# Altium PCB Light Panel - Copy.PcbDoc (part 2 of 2)
Units mm, origin at the board's own origin, x right, y up, seen from the top; angles counter-clockwise.
Board outline 300 x 185 mm, 2 copper layers (Top Layer, Bottom Layer), stack 1.671 mm thick; 278 components, 216 nets, 568 pads, 0 vias.
Unrouted connection lines stored in the file: 23.
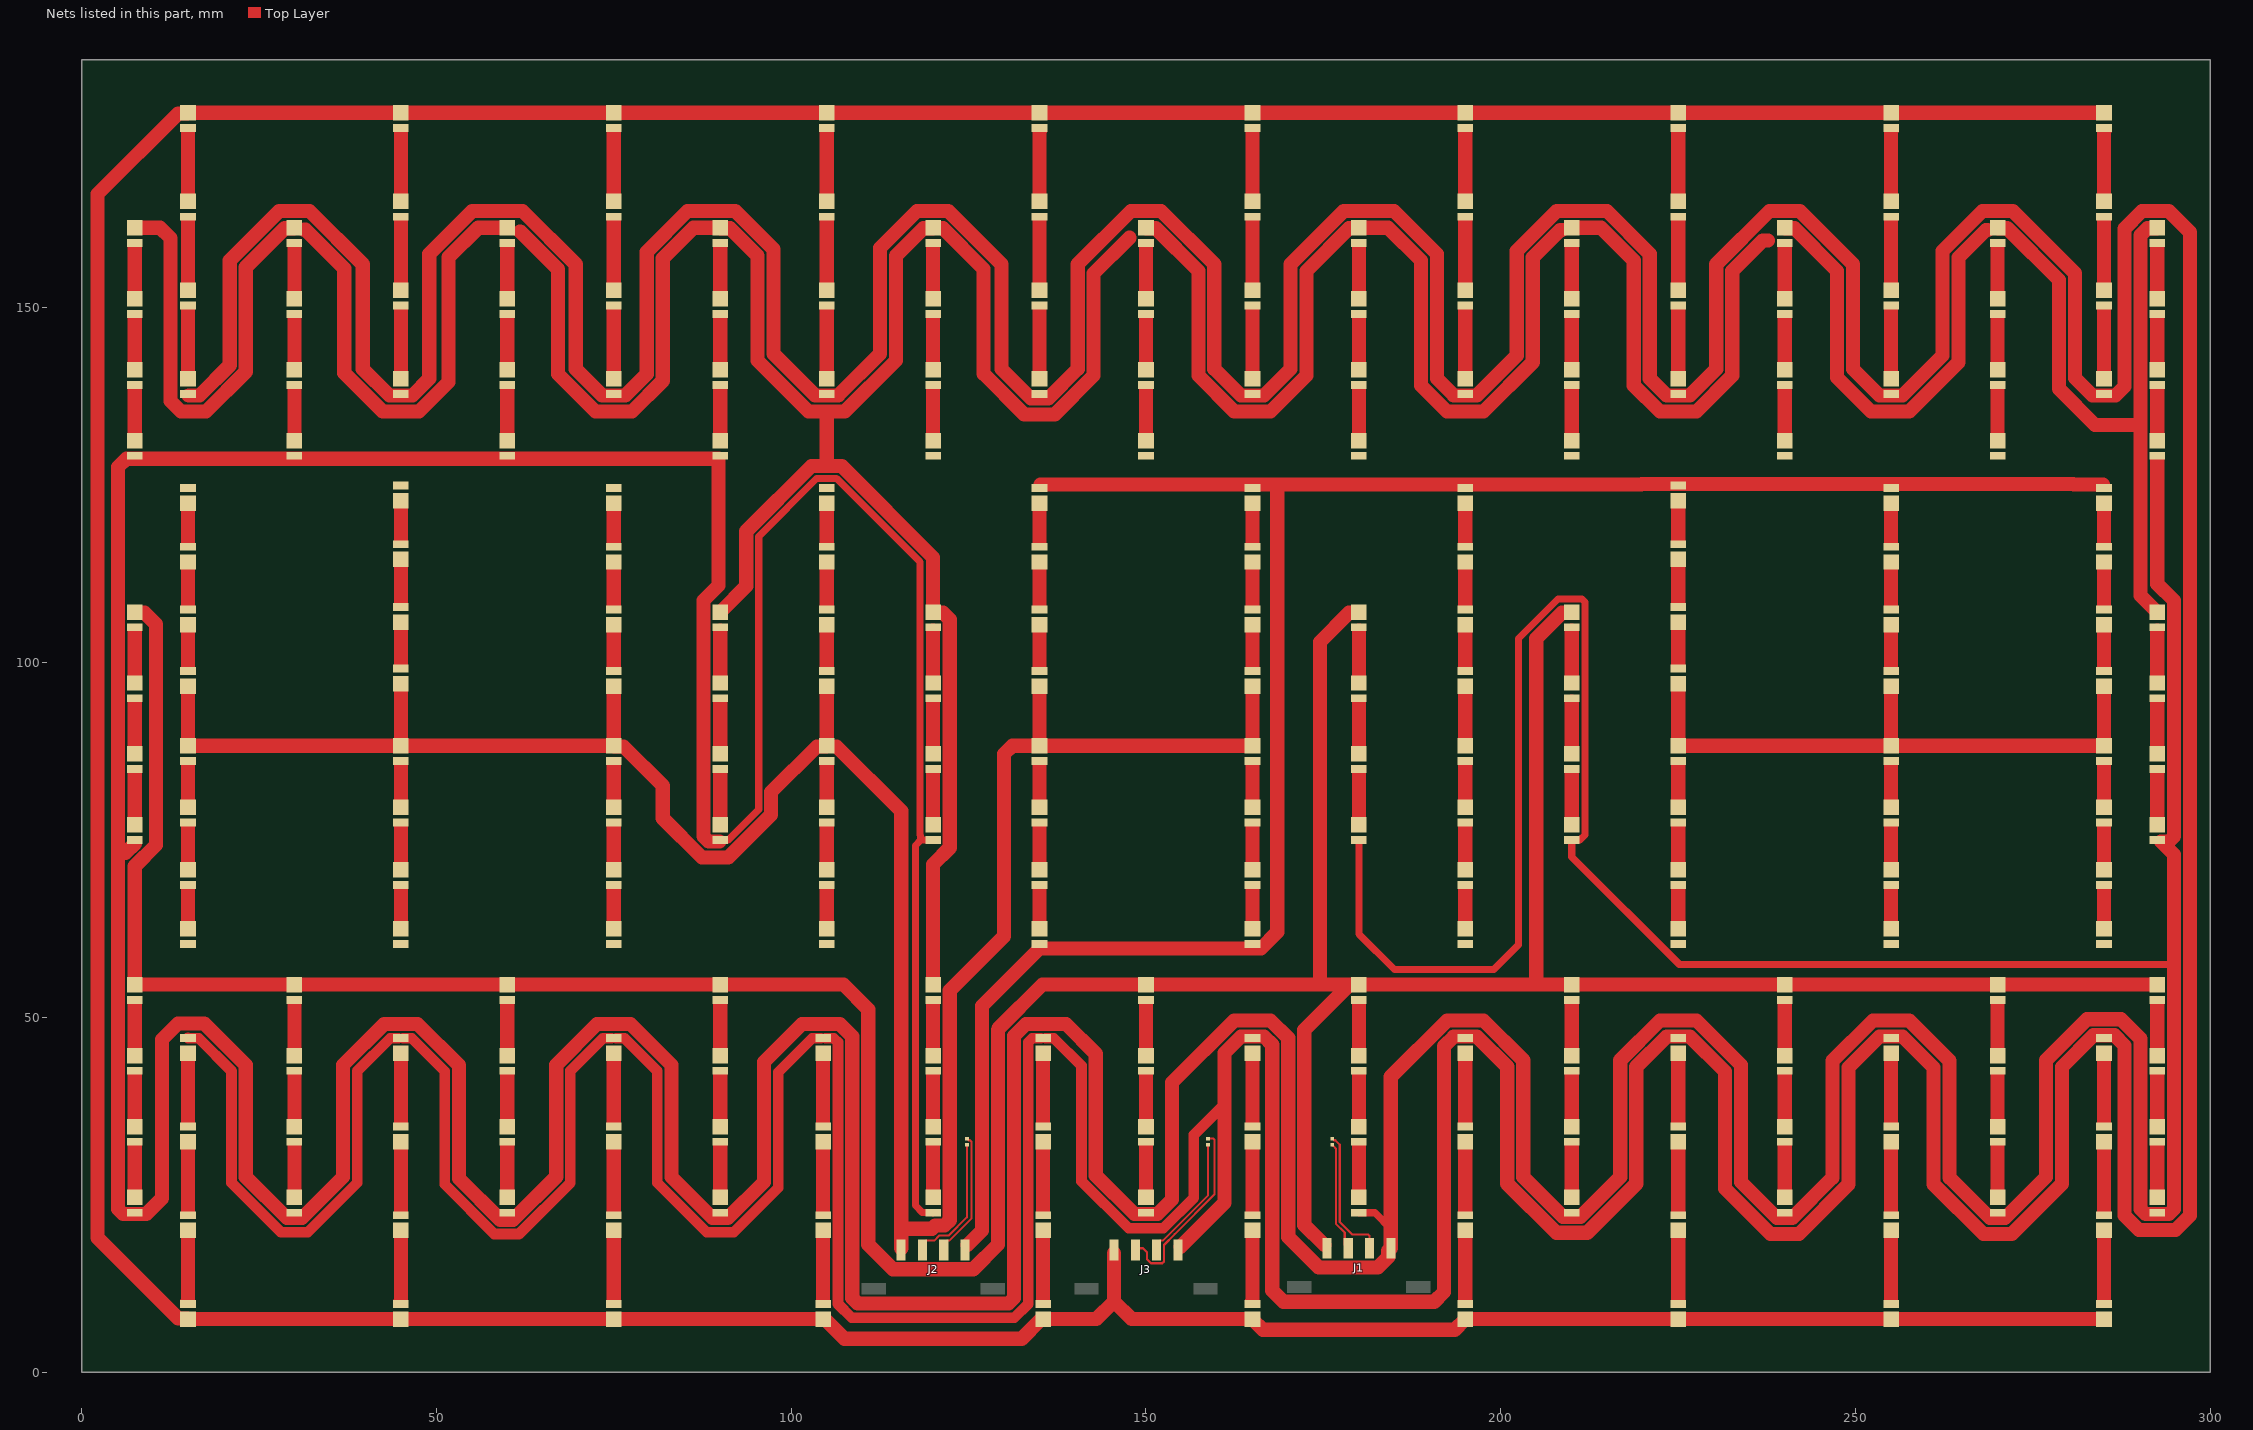
[diagram p2: the nets of this part, all layers, seen from the top]

## Part data
D1_WW1 D1_WW2 D1_WW3 D1_WW4 D1_WW5 D1_WW6 D1_WW7 D1_WW8 D1_WW9 D1_WW10 D1_WW11 D1_WW12 D1_WW13 D1_WW14 D1_WW15 D1_WW16 D1_WW17 D1_WW18 D1_WW19 D1_WW20 D2_WW1 D2_WW2 D2_WW3 D2_WW4 D2_WW5 D2_WW6 D2_WW7 D2_WW8 D2_WW9 D2_WW10 D2_WW11 D2_WW12 D2_WW13 D2_WW14 D2_WW15 D2_WW16 D2_WW17 D2_WW18 D2_WW19 D2_WW20 D3_WW1 D3_WW2 D3_WW3 D3_WW4 D3_WW5 D3_WW6 D3_WW7 D3_WW8 D3_WW9 D3_WW10 D3_WW11 D3_WW12 D3_WW13 D3_WW14 D3_WW15 D3_WW16 D3_WW17 D3_WW18 D3_WW19 D3_WW20 D4_WW1 D4_WW2 D4_WW3 D4_WW4 D4_WW5 D4_WW6 D4_WW7 D4_WW8 D4_WW9 D4_WW10 D4_WW11 D4_WW12 D4_WW13 D4_WW14 D4_WW15 D4_WW16 D4_WW17 D4_WW18 D4_WW19 D4_WW20: "LED", Color="White, Warm", CRI (Color Rendering Index)=90, Current - Max=200mA, Current - Test=65mA, Flux @ 25°C, Current - Test="30lm (29lm ~ 31lm)", Lumens/Watt @ Current - Test="165 lm/W", manufacturer="Samsung Semiconductor, Inc.", Supplier Device Package=2835, Supplier Part Number 1=1510-SPMWH1228MD7WAVUVKCT-ND, Voltage - Forward (Vf) (Typ)=2.8V, CCT (K)="3000K 3-Step MacAdam Ellipse", componentlink1description=Datasheet, componentlink1url=https://cdn.samsung.com/led/file/resource/2020/07/Data_Sheet_LM281B_Plus_Pro_VK_Rev.0.8.pdf, componentlink2description="DigiKey Link", componentlink2url=https://www.digikey.com/en/products/detail/samsung-semiconductor-inc/SPMWH1228MD7WAVUVK/12083623, Height - Seated (Max)="0.030\" (0.75mm)", lastupdated="21/03/2022 19:15:16", Lifecycle Status=Active, Minimum Order=1, Mounting Type="Surface Mount", packaging=TapeAndReel, Part Number=SPMWH1228MD7WAVUVK, Part Status=Active, partid=112, price=0.03, series=LM281B+, Size / Dimension="0.138\" L x 0.110\" W (3.50mm x 2.80mm)", Supplier 1=DigiKey, Viewing Angle=120°
D5_CW1 D5_CW2 D5_CW3 D5_CW4 D5_CW5 D5_CW6 D5_CW7 D5_CW8 D5_CW9 D5_CW10 D5_CW11 D5_CW12 D5_CW13 D5_CW14 D5_CW15 D5_CW16 D5_CW17 D5_CW18 D5_CW19 D5_CW20 D6_CW1 D6_CW2 D6_CW3 D6_CW4 D6_CW5 D6_CW6 D6_CW7 D6_CW8 D6_CW9 D6_CW10 D6_CW11 D6_CW12 D6_CW13 D6_CW14 D6_CW15 D6_CW16 D6_CW17 D6_CW18 D6_CW19 D6_CW20 D7_CW1 D7_CW2 D7_CW3 D7_CW4 D7_CW5 D7_CW6 D7_CW7 D7_CW8 D7_CW9 D7_CW10 D7_CW11 D7_CW12 D7_CW13 D7_CW14 D7_CW15 D7_CW16 D7_CW17 D7_CW18 D7_CW19 D7_CW20 D8_CW1 D8_CW2 D8_CW3 D8_CW4 D8_CW5 D8_CW6 D8_CW7 D8_CW8 D8_CW9 D8_CW10 D8_CW11 D8_CW12 D8_CW13 D8_CW14 D8_CW15 D8_CW16 D8_CW17 D8_CW18 D8_CW19 D8_CW20: "LED", Color="White, Cool", CRI (Color Rendering Index)=90, Current - Max=250mA, Current - Test=65mA, Device Package="1411 (3528 Metric)", Flux @ 25°C, Current - Test="33lm (32lm ~ 34lm)", Lumens/Watt @ Current - Test="181 lm/W", manufacturer="Samsung Semiconductor, Inc.", Supplier Device Package=1411, Supplier Part Number 1=1510-SPMWH1228MD7WAPMVLCT-ND, Voltage - Forward (Vf) (Typ)=2.8V, CCT (K)=6500K, componentlink1description=Datasheet, componentlink1url=https://media.digikey.com/pdf/Data%20Sheets/Samsung%20PDFs/LM281B_Plus%20Pro_VLrank_Rev_0.3_8-4-20.pdf, componentlink2description="DigiKey Link", componentlink2url=https://www.digikey.com/en/products/detail/samsung-semiconductor-inc/SPMWH1228MD7WAPMVL/13926354, Height - Seated (Max)="0.031\" (0.80mm)", lastupdated="21/03/2022 19:15:16", Lifecycle Status=Active, Minimum Order=1, Mounting Type="Surface Mount", Package / Case="1411 (3528 Metric)", packaging=TapeAndReel, Part Number=SPMWH1228MD7WAPMVL, Part Status=Active, partid=129, price=0.05, series=LM281B+, Size / Dimension="0.138\" L x 0.110\" W (3.50mm x 2.80mm)", Supplier 1=DigiKey, Viewing Angle=120°
D9_NW1 D9_NW2 D9_NW3 D9_NW4 D9_NW5 D9_NW6 D9_NW7 D9_NW8 D9_NW9 D9_NW10 D9_NW11 D9_NW12 D9_NW13 D9_NW14 D9_NW15 D9_NW16 D9_NW17 D9_NW18 D9_NW19 D9_NW20 D9_NW21 D9_NW22 D9_NW23 D9_NW24 D9_NW25 D9_NW26 D9_NW27 D9_NW28 D10_NW1 D10_NW2 D10_NW3 D10_NW4 D10_NW5 D10_NW6 D10_NW7 D10_NW8 D10_NW9 D10_NW10 D10_NW11 D10_NW12 D10_NW13 D10_NW14 D10_NW15 D10_NW16 D10_NW17 D10_NW18 D10_NW19 D10_NW20 D10_NW21 D10_NW22 D10_NW23 D10_NW24 D10_NW25 D10_NW26 D10_NW27 D10_NW28 D11_NW1 D11_NW2 D11_NW3 D11_NW4 D11_NW5 D11_NW6 D11_NW7 D11_NW8 D11_NW9 D11_NW10 D11_NW11 D11_NW12 D11_NW13 D11_NW14 D11_NW15 D11_NW16 D11_NW17 D11_NW18 D11_NW19 D11_NW20 D11_NW21 D11_NW22 D11_NW23 D11_NW24 D11_NW25 D11_NW26 D11_NW27 D11_NW28 D12_NW1 D12_NW2 D12_NW3 D12_NW4 D12_NW5 D12_NW6 D12_NW7 D12_NW8 D12_NW9 D12_NW10 D12_NW11 D12_NW12 D12_NW13 D12_NW14 D12_NW15 D12_NW16 D12_NW17 D12_NW18 D12_NW19 D12_NW20 D12_NW21 D12_NW22 D12_NW23 D12_NW24 D12_NW25 D12_NW26 D12_NW27 D12_NW28: "LED", Color="White, Neutral", CRI (Color Rendering Index)=90, Current - Max=250mA, Current - Test=65mA, Device Package="1411 (3528 Metric)", Flux @ 25°C, Current - Test="33lm (32lm ~ 34lm)", Lumens/Watt @ Current - Test="181 lm/W", manufacturer="Samsung Semiconductor, Inc.", Supplier Device Package=1411, Supplier Part Number 1=1510-SPMWH1228MD7WATMVLCT-ND, Voltage - Forward (Vf) (Typ)=2.8V, CCT (K)=4000K, componentlink1description=Datasheet, componentlink1url=https://media.digikey.com/pdf/Data%20Sheets/Samsung%20PDFs/LM281B_Plus%20Pro_VLrank_Rev_0.3_8-4-20.pdf, componentlink2description="DigiKey Link", componentlink2url=https://www.digikey.com/en/products/detail/samsung-semiconductor-inc/SPMWH1228MD7WATMVL/13926315, Height - Seated (Max)="0.031\" (0.80mm)", lastupdated="21/03/2022 19:15:15", Lifecycle Status=Active, Minimum Order=1, Mounting Type="Surface Mount", Package / Case="1411 (3528 Metric)", packaging=TapeAndReel, Part Number=SPMWH1228MD7WATMVL, Part Status=Active, partid=111, price=0.05, series=LM281B+, Size / Dimension="0.138\" L x 0.110\" W (3.50mm x 2.80mm)", Supplier 1=DigiKey, Viewing Angle=120°
J1 J2 J3: "CONN HEADER SMD R/A 4POS 3MM", Insulation Color=Black, manufacturer=Molex, Material Flammability Rating="UL94 V-0", Supplier Part Number 1=WM1892CT-ND, componentlink1description=Datasheet, componentlink1url=https://www.molex.com/pdm_docs/sd/436500412_sd.pdf, componentlink2description="DigiKey Link", componentlink2url=https://www.digikey.com/en/products/detail/molex/0436500412/3451041, Connector Type=Header, Contact Finish - Mating=Tin, Contact Finish - Post=Tin, Contact Finish Thickness - Mating="60.0µin (1.52µm)", Contact Material=Brass, Contact Shape=Square, Contact Type="Male Pin", Fastening Type="Locking Ramp", Features="Solder Retention", Insulation Height="0.172\" (4.37mm)", Insulation Material="Liquid Crystal Polymer (LCP), Glass Filled", lastupdated="21/03/2022 20:35:03", Lifecycle Status=Active, Minimum Order=1, Mounting Type="Surface Mount, Right Angle", Number of Positions=4, Number of Positions Loaded=All, Number of Rows=1, packaging=TapeAndReel, Part Number=0436500412, Part Status=Active, partid=134, Pitch - Mating="0.118\" (3.00mm)", price=1.64, series="Micro-Fit 3.0 43650", Shrouding="Shrouded - 4 Wall", Style="Board to Cable/Wire", Supplier 1=DigiKey, Termination=Solder
R1 R2 R3: library part NTCG104BF473FT1X, "THERMISTOR NTC 47KOHM 4485K 0402", B Value Tolerance=±1%, Device Package="0402 (1005 Metric)", manufacturer="TDK Corporation", Operating Temperature="-40°C ~ 125°C", Power - Max="100 mW", Supplier Part Number 1=445-174900-1-ND, B25/50=4485K, B25/85=4550K, componentlink1description=Datasheet, componentlink1url=https://product.tdk.com/info/en/catalog/datasheets/503021/tpd_commercial_ntc-thermistor_ntcg_en.pdf?ref_disty=digikey, componentlink2description="DigiKey Link", componentlink2url=https://www.digikey.com/en/products/detail/tdk-corporation/NTCG104BF473FT1X/5285693, lastupdated="21/03/2022 19:01:14", Lifecycle Status=Active, Minimum Order=1, Mounting Type="Surface Mount", Package / Case="0402 (1005 Metric)", packaging=TapeAndReel, Part Number=NTCG104BF473FT1X, Part Status=Active, partid=53, price=0.03, Resistance in Ohms @ 25°C=47k, Resistance Tolerance=±1%, series=NTCG, Supplier 1=DigiKey

## Nets (pads, with @x,y where several pads share a name; then routed paths per layer and width w, separated by ;. In a path a pad name is that pad's centre, name@x,y a point inside that pad or via, vN(x,y) a via of type N, cw(c..) or ccw(c..) an arc to the next point about the centre after c; other vN are vias at no path point)
NetD1_WW1_A: D1_WW1.A D1_WW2.A D1_WW3.A D1_WW4.A D1_WW5.A D1_WW6.A D1_WW7.A D1_WW8.A D1_WW9.A D1_WW10.A D1_WW11.A D1_WW12.A D1_WW13.A D1_WW14.A D1_WW15.A D1_WW16.A D1_WW17.A D1_WW18.A D1_WW19.A D1_WW20.A J2.1 | length 293.3
  Top Layer w2: J2.1@124.865,17.96 126.884,19.979 126.884,28.297 126.884,51.634 135,59.75 165,59.75 166.213,59.75 168.5,62.037 168.5,125.097 ; D1_WW16.A@135.153,125.097 219.773,125.097 219.875,125.199 280.648,125.199 280.75,125.097 D1_WW2.A@284.847,125.097
NetD1_WW1_C: D1_WW1.C D2_WW1.A | length 5.5
  Top Layer w2: D1_WW1.C@285,62.5 285,68
NetD1_WW2_C: D1_WW2.C D2_WW2.A | length 5.5
  Top Layer w2: 285,117 D1_WW2.C@285,122.5
NetD1_WW3_C: D1_WW3.C D2_WW3.A | length 5.5
  Top Layer w2: 255,117 D1_WW3.C@255,122.5
NetD1_WW4_C: D1_WW4.C D2_WW4.A | length 5.5
  Top Layer w2: D1_WW4.C@255,62.5 255,68
NetD1_WW5_C: D1_WW5.C D2_WW5.A | length 5.5
  Top Layer w2: D1_WW5.C@225,62.5 225,68
NetD1_WW6_C: D1_WW6.C D2_WW6.A | length 5.5
  Top Layer w2: D1_WW6.C@195,62.5 195,68
NetD1_WW7_C: D1_WW7.C D2_WW7.A | length 5.5
  Top Layer w2: D1_WW7.C@165,62.5 165,68
NetD1_WW8_C: D1_WW8.C D2_WW8.A | length 5.5
  Top Layer w2: D1_WW8.C@135,62.5 135,68
NetD1_WW9_C: D1_WW9.C D2_WW9.A | length 5.5
  Top Layer w2: D1_WW9.C@105,62.5 105,68
NetD1_WW10_C: D1_WW10.C D2_WW10.A | length 5.5
  Top Layer w2: D1_WW10.C@75,62.5 75,68
NetD1_WW11_C: D1_WW11.C D2_WW11.A | length 5.5
  Top Layer w2: D1_WW11.C@45,62.5 45,68
NetD1_WW12_C: D1_WW12.C D2_WW12.A | length 5.5
  Top Layer w2: D1_WW12.C@15,62.5 15,68
NetD1_WW13_C: D1_WW13.C D2_WW13.A | length 5.5
  Top Layer w2: 225,117.355 D1_WW13.C@225,122.855
NetD1_WW14_C: D1_WW14.C D2_WW14.A | length 5.5
  Top Layer w2: 195,117 D1_WW14.C@195,122.5
NetD1_WW15_C: D1_WW15.C D2_WW15.A | length 5.5
  Top Layer w2: 165,117 D1_WW15.C@165,122.5
NetD1_WW16_C: D1_WW16.C D2_WW16.A | length 5.5
  Top Layer w2: 135,117 D1_WW16.C@135,122.5
NetD1_WW17_C: D1_WW17.C D2_WW17.A | length 5.5
  Top Layer w2: 105,117 D1_WW17.C@105,122.5
NetD1_WW18_C: D1_WW18.C D2_WW18.A | length 5.5
  Top Layer w2: 75,117 D1_WW18.C@75,122.5
NetD1_WW19_C: D1_WW19.C D2_WW19.A | length 5.5
  Top Layer w2: 45,117.355 D1_WW19.C@45,122.855
NetD1_WW20_C: D1_WW20.C D2_WW20.A | length 5.5
  Top Layer w2: 15,117 D1_WW20.C@15,122.5
NetD2_WW1_C: D2_WW1.C D3_WW1.A | length 5.9
  Top Layer w2: D2_WW1.C@285,70.805 285,76.75
NetD2_WW2_C: D2_WW2.C D3_WW2.A | length 5.9
  Top Layer w2: 285,108.25 D2_WW2.C@285,114.195
NetD2_WW3_C: D2_WW3.C D3_WW3.A | length 5.9
  Top Layer w2: 255,108.25 D2_WW3.C@255,114.195
NetD2_WW4_C: D2_WW4.C D3_WW4.A | length 5.9
  Top Layer w2: D2_WW4.C@255,70.805 255,76.75
NetD2_WW5_C: D2_WW5.C D3_WW5.A | length 5.9
  Top Layer w2: D2_WW5.C@225,70.805 225,76.75
NetD2_WW6_C: D2_WW6.C D3_WW6.A | length 5.9
  Top Layer w2: D2_WW6.C@195,70.805 195,76.75
NetD2_WW7_C: D2_WW7.C D3_WW7.A | length 5.9
  Top Layer w2: D2_WW7.C@165,70.805 165,76.75
NetD2_WW8_C: D2_WW8.C D3_WW8.A | length 5.9
  Top Layer w2: D2_WW8.C@135,70.805 135,76.75
NetD2_WW9_C: D2_WW9.C D3_WW9.A | length 5.9
  Top Layer w2: D2_WW9.C@105,70.805 105,76.75
NetD2_WW10_C: D2_WW10.C D3_WW10.A | length 5.9
  Top Layer w2: D2_WW10.C@75,70.805 75,76.75
NetD2_WW11_C: D2_WW11.C D3_WW11.A | length 5.9
  Top Layer w2: D2_WW11.C@45,70.805 45,76.75
NetD2_WW12_C: D2_WW12.C D3_WW12.A | length 5.9
  Top Layer w2: D2_WW12.C@15,70.805 15,76.75
NetD2_WW13_C: D2_WW13.C D3_WW13.A | length 5.9
  Top Layer w2: 225,108.605 D2_WW13.C@225,114.55
NetD2_WW14_C: D2_WW14.C D3_WW14.A | length 5.9
  Top Layer w2: 195,108.25 D2_WW14.C@195,114.195
NetD2_WW15_C: D2_WW15.C D3_WW15.A | length 5.9
  Top Layer w2: 165,108.25 D2_WW15.C@165,114.195
NetD2_WW16_C: D2_WW16.C D3_WW16.A | length 5.9
  Top Layer w2: 135,108.25 D2_WW16.C@135,114.195
NetD2_WW17_C: D2_WW17.C D3_WW17.A | length 5.9
  Top Layer w2: 105,108.25 D2_WW17.C@105,114.195
NetD2_WW18_C: D2_WW18.C D3_WW18.A | length 5.9
  Top Layer w2: 75,108.25 D2_WW18.C@75,114.195
NetD2_WW19_C: D2_WW19.C D3_WW19.A | length 5.9
  Top Layer w2: 45,108.605 D2_WW19.C@45,114.55
NetD2_WW20_C: D2_WW20.C D3_WW20.A | length 5.9
  Top Layer w2: 15,108.25 D2_WW20.C@15,114.195
NetD3_WW1_C: D3_WW1.C D4_WW1.A | length 5.9
  Top Layer w2: D3_WW1.C@285,79.645 285,85.5
NetD3_WW2_C: D3_WW2.C D4_WW2.A | length 5.9
  Top Layer w2: 285,99.5 D3_WW2.C@285,105.355
NetD3_WW3_C: D3_WW3.C D4_WW3.A | length 5.9
  Top Layer w2: 255,99.5 D3_WW3.C@255,105.355
NetD3_WW4_C: D3_WW4.C D4_WW4.A | length 5.9
  Top Layer w2: D3_WW4.C@255,79.645 255,85.5
NetD3_WW5_C: D3_WW5.C D4_WW5.A | length 5.9
  Top Layer w2: D3_WW5.C@225,79.645 225,85.5
NetD3_WW6_C: D3_WW6.C D4_WW6.A | length 5.9
  Top Layer w2: D3_WW6.C@195,79.645 195,85.5
NetD3_WW7_C: D3_WW7.C D4_WW7.A | length 5.9
  Top Layer w2: D3_WW7.C@165,79.645 165,85.5
NetD3_WW8_C: D3_WW8.C D4_WW8.A | length 5.9
  Top Layer w2: D3_WW8.C@135,79.645 135,85.5
NetD3_WW9_C: D3_WW9.C D4_WW9.A | length 5.9
  Top Layer w2: D3_WW9.C@105,79.645 105,85.5
NetD3_WW10_C: D3_WW10.C D4_WW10.A | length 5.9
  Top Layer w2: D3_WW10.C@75,79.645 75,85.5
NetD3_WW11_C: D3_WW11.C D4_WW11.A | length 5.9
  Top Layer w2: D3_WW11.C@45,79.645 45,85.5
NetD3_WW12_C: D3_WW12.C D4_WW12.A | length 5.9
  Top Layer w2: D3_WW12.C@15,79.645 15,85.5
NetD3_WW13_C: D3_WW13.C D4_WW13.A | length 5.9
  Top Layer w2: 225,99.855 D3_WW13.C@225,105.71
NetD3_WW14_C: D3_WW14.C D4_WW14.A | length 5.9
  Top Layer w2: 195,99.5 D3_WW14.C@195,105.355
NetD3_WW15_C: D3_WW15.C D4_WW15.A | length 5.9
  Top Layer w2: 165,99.5 D3_WW15.C@165,105.355
NetD3_WW16_C: D3_WW16.C D4_WW16.A | length 5.9
  Top Layer w2: 135,99.5 D3_WW16.C@135,105.355
NetD3_WW17_C: D3_WW17.C D4_WW17.A | length 5.9
  Top Layer w2: 105,99.5 D3_WW17.C@105,105.355
NetD3_WW18_C: D3_WW18.C D4_WW18.A | length 5.9
  Top Layer w2: 75,99.5 D3_WW18.C@75,105.355
NetD3_WW19_C: D3_WW19.C D4_WW19.A | length 5.9
  Top Layer w2: 45,99.855 D3_WW19.C@45,105.71
NetD3_WW20_C: D3_WW20.C D4_WW20.A | length 5.9
  Top Layer w2: 15,99.5 D3_WW20.C@15,105.355
NetD4_WW1_C: D4_WW1.C D4_WW2.C D4_WW3.C D4_WW4.C D4_WW5.C D4_WW6.C D4_WW7.C D4_WW8.C D4_WW9.C D4_WW10.C D4_WW11.C D4_WW12.C D4_WW13.C D4_WW14.C D4_WW15.C D4_WW16.C D4_WW17.C D4_WW18.C D4_WW19.C D4_WW20.C J2.4 | length 438.4
  Top Layer w2: D4_WW20.C@15,96.695 D4_WW12.C@15,88.305 D4_WW11.C@45,88.305 ; D4_WW19.C@45,97.05 D4_WW11.C@45,88.305 ; D4_WW18.C@75,96.695 D4_WW10.C@75,88.305 ; D4_WW17.C@105,96.695 D4_WW9.C@105,88.305 104.91,88.215 103.627,88.215 97.178,81.766 97.178,78.586 91.139,72.547 87.447,72.547 81.91,78.084 81.91,82.678 76.373,88.215 75.09,88.215 D4_WW10.C@75,88.305 ; 106.373,88.215 115.5,79.088 115.5,20.25 ; J2.4@115.5,17.5 115.5,20.25 ; D4_WW16.C@135,96.695 D4_WW8.C@135,88.305 ; D4_WW15.C@165,96.695 D4_WW7.C@165,88.305 D4_WW8.C@135,88.305 ; D4_WW6.C@195,88.305 D4_WW14.C@195,96.695 ; D4_WW13.C@225,97.05 D4_WW5.C@225,88.305 D4_WW4.C@255,88.305 ; D4_WW3.C@255,96.695 D4_WW4.C@255,88.305 ; D4_WW2.C@285,96.695 D4_WW1.C@285,88.305 D4_WW4.C@255,88.305 ; D4_WW11.C@45,88.305 D4_WW10.C@75,88.305 ; 115.5,20.25 119.848,20.25 120.289,20.691 121.62,20.691 122.354,21.426 122.354,53.811 130,61.457 130,87.133 131.172,88.305 D4_WW8.C@135,88.305
NetD5_CW1_A: D5_CW1.A D5_CW2.A D5_CW3.A D5_CW4.A D5_CW5.A D5_CW6.A D5_CW7.A D5_CW8.A D5_CW9.A D5_CW10.A D5_CW11.A D5_CW12.A D5_CW13.A D5_CW14.A D5_CW15.A D5_CW16.A D5_CW17.A D5_CW18.A D5_CW19.A D5_CW20.A J3.1 | length 1566.9
  Top Layer w1.5: D5_CW10.A@15,47.145 15.051,47.094 16.516,47.094 21.135,42.475 21.135,26.713 28.102,19.746 31.899,19.746 38.865,26.713 38.865,42.475 43.484,47.094 D5_CW9.A@44.65,47.094 ; D5_CW9.A@45.35,47.094 46.516,47.094 51.169,42.441 51.169,26.497 58.17,19.496 61.649,19.496 68.891,26.738 68.891,42.501 73.484,47.094 D5_CW8.A@74.65,47.094 ; D5_CW8.A@75.35,47.094 76.516,47.094 81.135,42.475 81.135,26.713 88.102,19.746 91.899,19.746 98.162,26.009 98.162,42.272 102.984,47.094 D5_CW7.A@104.15,47.094 ; D5_CW7.A@104.85,47.094 106.016,47.094 106.604,46.506 106.604,9.643 108.55,7.697 131.45,7.697 133.396,9.643 133.396,46.506 133.984,47.094 D5_CW6.A@135.15,47.094 ; D5_CW6.A@135.85,47.094 137.016,47.094 140.92,43.19 140.92,26.928 147.551,20.297 152.45,20.297 156.752,24.6 156.752,33.502 161.055,37.805
  Top Layer w2: D5_CW20.A@15.1,137.656 16.619,137.656 20.895,141.932 20.895,156.671 27.873,163.649 32.127,163.649 39.631,156.145 39.631,141.406 43.381,137.656 D5_CW19.A@44.9,137.656 ; D5_CW19.A@45.1,137.656 46.619,137.656 49.006,140.042 49.006,157.598 55.057,163.649 62.127,163.649 69.631,156.145 69.631,141.406 73.381,137.656 D5_CW18.A@74.9,137.656 ; D5_CW18.A@75.1,137.656 76.619,137.656 79.644,140.68 79.644,157.894 85.399,163.649 92.127,163.649 97.5,158.276 97.5,143.537 103.381,137.656 D5_CW17.A@104.9,137.656 ; D5_CW17.A@105.1,137.656 106.619,137.656 112.5,143.537 112.5,158.438 117.711,163.649 122.127,163.649 129.631,156.145 129.631,141.406 133.787,137.25 135,137.25 136.213,137.25 140.369,141.406 140.369,156.145 147.873,163.649 152.127,163.649 159.631,156.145 159.631,141.406 163.381,137.656 D5_CW15.A@164.9,137.656 ; J3.1@154.865,17.71 161.055,23.9 161.055,37.805 161.055,45.018 163.381,47.344 D5_CW5.A@164.9,47.344 ; D5_CW5.A@165.1,47.344 166.619,47.344 167.799,46.165 167.799,11.533 169.381,9.951 190.619,9.951 192,11.332 192,45.963 193.381,47.344 D5_CW4.A@194.9,47.344 ; D5_CW15.A@165.1,137.656 166.619,137.656 170.369,141.406 170.369,156.145 177.873,163.649 184.944,163.649 190.994,157.598 190.994,140.042 193.381,137.656 D5_CW14.A@194.9,137.656 ; D5_CW4.A@195.1,47.344 196.619,47.344 200.904,43.06 200.904,26.59 207.829,19.665 212.171,19.665 219.096,26.59 219.096,43.06 223.381,47.344 D5_CW3.A@224.9,47.344 ; D5_CW14.A@195.1,137.656 196.619,137.656 202.246,143.283 202.246,158.022 207.873,163.649 214.944,163.649 220.994,157.598 220.994,140.042 223.381,137.656 D5_CW13.A@224.9,137.656 ; D5_CW3.A@225.1,47.344 226.619,47.344 231.58,42.383 231.58,25.914 237.998,19.496 242.002,19.496 249.012,26.506 249.012,42.975 253.381,47.344 D5_CW2.A@254.9,47.344 ; D5_CW13.A@225.1,137.656 226.619,137.656 230.369,141.406 230.369,156.145 237.873,163.649 242.127,163.649 249.631,156.145 249.631,141.406 253.381,137.656 D5_CW12.A@254.9,137.656 ; D5_CW2.A@255.1,47.344 256.619,47.344 260.988,42.975 260.988,26.506 267.998,19.496 272.002,19.496 279.09,26.584 279.09,43.053 283.537,47.5 D5_CW1.A@284.9,47.5 ; D5_CW12.A@255.1,137.656 256.619,137.656 262.246,143.283 262.246,158.022 267.873,163.649 272.127,163.649 280.904,154.872 280.904,140.133 283.381,137.656 D5_CW11.A@284.9,137.656 ; D5_CW1.A@285.1,47.5 286.463,47.5 287.892,46.071 287.892,22.102 289.947,20.047 295.053,20.047 297.108,22.102 297.108,160.66 294.12,163.649 290.373,163.649 287.892,161.168 287.892,138.929 286.619,137.656 D5_CW11.A@285.1,137.656
NetD5_CW1_C: D5_CW1.C D6_CW1.A | length 9.7
  Top Layer w2: 285,35.25 D5_CW1.C@285,45
NetD5_CW2_C: D5_CW2.C D6_CW2.A | length 9.7
  Top Layer w2: 255,35.25 D5_CW2.C@255,45
NetD5_CW3_C: D5_CW3.C D6_CW3.A | length 9.7
  Top Layer w2: 225,35.25 D5_CW3.C@225,45
NetD5_CW4_C: D5_CW4.C D6_CW4.A | length 9.7
  Top Layer w2: 195,35.25 D5_CW4.C@195,45
NetD5_CW5_C: D5_CW5.C D6_CW5.A | length 9.7
  Top Layer w2: 165,35.25 D5_CW5.C@165,45
NetD5_CW6_C: D5_CW6.C D6_CW6.A | length 9.7
  Top Layer w2: 135.5,35.25 D5_CW6.C@135.5,45
NetD5_CW7_C: D5_CW7.C D6_CW7.A | length 9.7
  Top Layer w2: 104.5,35.25 D5_CW7.C@104.5,45
NetD5_CW8_C: D5_CW8.C D6_CW8.A | length 9.7
  Top Layer w2: 75,35.25 D5_CW8.C@75,45
NetD5_CW9_C: D5_CW9.C D6_CW9.A | length 9.7
  Top Layer w2: 45,35.25 D5_CW9.C@45,45
NetD5_CW10_C: D5_CW10.C D6_CW10.A | length 9.7
  Top Layer w2: 15,35.25 D5_CW10.C@15,45
NetD5_CW11_C: D5_CW11.C D6_CW11.A | length 9.7
  Top Layer w2: D5_CW11.C@285,140 285,149.75
NetD5_CW12_C: D5_CW12.C D6_CW12.A | length 9.7
  Top Layer w2: D5_CW12.C@255,140 255,149.75
NetD5_CW13_C: D5_CW13.C D6_CW13.A | length 9.7
  Top Layer w2: D5_CW13.C@225,140 225,149.75
NetD5_CW14_C: D5_CW14.C D6_CW14.A | length 9.7
  Top Layer w2: D5_CW14.C@195,140 195,149.75
NetD5_CW15_C: D5_CW15.C D6_CW15.A | length 9.7
  Top Layer w2: D5_CW15.C@165,140 165,149.75
NetD5_CW16_C: D5_CW16.C D6_CW16.A | length 9.7
  Top Layer w2: D5_CW16.C@135,140 135,149.75
NetD5_CW17_C: D5_CW17.C D6_CW17.A | length 9.7
  Top Layer w2: D5_CW17.C@105,140 105,149.75
NetD5_CW18_C: D5_CW18.C D6_CW18.A | length 9.7
  Top Layer w2: D5_CW18.C@75,140 75,149.75
NetD5_CW19_C: D5_CW19.C D6_CW19.A | length 9.7
  Top Layer w2: D5_CW19.C@45,140 45,149.75
NetD5_CW20_C: D5_CW20.C D6_CW20.A | length 9.7
  Top Layer w2: D5_CW20.C@15,140 15,149.75
NetD6_CW1_C: D6_CW1.C D7_CW1.A | length 9.9
  Top Layer w2: D7_CW1.A@285,22.59 D6_CW1.C@285,32.5
NetD6_CW2_C: D6_CW2.C D7_CW2.A | length 9.9
  Top Layer w2: D7_CW2.A@255,22.59 D6_CW2.C@255,32.5
NetD6_CW3_C: D6_CW3.C D7_CW3.A | length 9.9
  Top Layer w2: D7_CW3.A@225,22.59 D6_CW3.C@225,32.5
NetD6_CW4_C: D6_CW4.C D7_CW4.A | length 9.9
  Top Layer w2: D7_CW4.A@195,22.59 D6_CW4.C@195,32.5
NetD6_CW5_C: D6_CW5.C D7_CW5.A | length 9.9
  Top Layer w2: D7_CW5.A@165,22.59 D6_CW5.C@165,32.5
NetD6_CW6_C: D6_CW6.C D7_CW6.A | length 9.9
  Top Layer w2: D7_CW6.A@135.5,22.59 D6_CW6.C@135.5,32.5
NetD6_CW7_C: D6_CW7.C D7_CW7.A | length 9.9
  Top Layer w2: D7_CW7.A@104.5,22.59 D6_CW7.C@104.5,32.5
NetD6_CW8_C: D6_CW8.C D7_CW8.A | length 9.9
  Top Layer w2: D7_CW8.A@75,22.59 D6_CW8.C@75,32.5
NetD6_CW9_C: D6_CW9.C D7_CW9.A | length 9.9
  Top Layer w2: D7_CW9.A@45,22.59 D6_CW9.C@45,32.5
NetD6_CW10_C: D6_CW10.C D7_CW10.A | length 9.9
  Top Layer w2: D7_CW10.A@15,22.59 D6_CW10.C@15,32.5
NetD6_CW11_C: D6_CW11.C D7_CW11.A | length 9.9
  Top Layer w2: D6_CW11.C@285,152.5 D7_CW11.A@285,162.41
NetD6_CW12_C: D6_CW12.C D7_CW12.A | length 9.9
  Top Layer w2: D6_CW12.C@255,152.5 D7_CW12.A@255,162.41
NetD6_CW13_C: D6_CW13.C D7_CW13.A | length 9.9
  Top Layer w2: D6_CW13.C@225,152.5 D7_CW13.A@225,162.41
NetD6_CW14_C: D6_CW14.C D7_CW14.A | length 9.9
  Top Layer w2: D6_CW14.C@195,152.5 D7_CW14.A@195,162.41
NetD6_CW15_C: D6_CW15.C D7_CW15.A | length 9.9
  Top Layer w2: D6_CW15.C@165,152.5 D7_CW15.A@165,162.41
NetD6_CW16_C: D6_CW16.C D7_CW16.A | length 9.9
  Top Layer w2: D6_CW16.C@135,152.5 D7_CW16.A@135,162.41
NetD6_CW17_C: D6_CW17.C D7_CW17.A | length 9.9
  Top Layer w2: D6_CW17.C@105,152.5 D7_CW17.A@105,162.41
NetD6_CW18_C: D6_CW18.C D7_CW18.A | length 9.9
  Top Layer w2: D6_CW18.C@75,152.5 D7_CW18.A@75,162.41
NetD6_CW19_C: D6_CW19.C D7_CW19.A | length 9.9
  Top Layer w2: D6_CW19.C@45,152.5 D7_CW19.A@45,162.41
NetD6_CW20_C: D6_CW20.C D7_CW20.A | length 9.9
  Top Layer w2: D6_CW20.C@15,152.5 D7_CW20.A@15,162.41
NetD7_CW1_C: D7_CW1.C D8_CW1.A | length 9.9
  Top Layer w2: D8_CW1.A@284.978,10.099 285,10.121 D7_CW1.C@285,20
NetD7_CW2_C: D7_CW2.C D8_CW2.A | length 9.9
  Top Layer w2: D8_CW2.A@254.978,10.099 255,10.121 D7_CW2.C@255,20
NetD7_CW3_C: D7_CW3.C D8_CW3.A | length 9.9
  Top Layer w2: D8_CW3.A@224.978,10.099 225,10.121 D7_CW3.C@225,20
NetD7_CW4_C: D7_CW4.C D8_CW4.A | length 9.9
  Top Layer w2: D8_CW4.A@194.978,10.099 195,10.121 D7_CW4.C@195,20
NetD7_CW5_C: D7_CW5.C D8_CW5.A | length 9.9
  Top Layer w2: D8_CW5.A@164.978,10.099 165,10.121 D7_CW5.C@165,20
NetD7_CW6_C: D7_CW6.C D8_CW6.A | length 9.9
  Top Layer w2: D8_CW6.A@135.478,10.099 135.5,10.121 D7_CW6.C@135.5,20
NetD7_CW7_C: D7_CW7.C D8_CW7.A | length 9.9
  Top Layer w2: D8_CW7.A@104.478,10.099 104.5,10.121 D7_CW7.C@104.5,20
NetD7_CW8_C: D7_CW8.C D8_CW8.A | length 9.9
  Top Layer w2: D8_CW8.A@74.978,10.099 75,10.121 D7_CW8.C@75,20
NetD7_CW9_C: D7_CW9.C D8_CW9.A | length 9.9
  Top Layer w2: D8_CW9.A@44.978,10.099 45,10.121 D7_CW9.C@45,20
NetD7_CW10_C: D7_CW10.C D8_CW10.A | length 9.9
  Top Layer w2: D8_CW10.A@14.978,10.099 15,10.121 D7_CW10.C@15,20
NetD7_CW11_C: D7_CW11.C D8_CW11.A | length 9.9
  Top Layer w2: D7_CW11.C@285,165 285,174.879 D8_CW11.A@285.022,174.901
NetD7_CW12_C: D7_CW12.C D8_CW12.A | length 9.9
  Top Layer w2: D7_CW12.C@255,165 255,174.879 D8_CW12.A@255.022,174.901
NetD7_CW13_C: D7_CW13.C D8_CW13.A | length 9.9
  Top Layer w2: D7_CW13.C@225,165 225,174.879 D8_CW13.A@225.022,174.901
NetD7_CW14_C: D7_CW14.C D8_CW14.A | length 9.9
  Top Layer w2: D7_CW14.C@195,165 195,174.879 D8_CW14.A@195.022,174.901
NetD7_CW15_C: D7_CW15.C D8_CW15.A | length 9.9
  Top Layer w2: D7_CW15.C@165,165 165,174.879 D8_CW15.A@165.022,174.901
NetD7_CW16_C: D7_CW16.C D8_CW16.A | length 9.9
  Top Layer w2: D7_CW16.C@135,165 135,174.879 D8_CW16.A@135.022,174.901
NetD7_CW17_C: D7_CW17.C D8_CW17.A | length 9.9
  Top Layer w2: D7_CW17.C@105,165 105,174.879 D8_CW17.A@105.022,174.901
NetD7_CW18_C: D7_CW18.C D8_CW18.A | length 9.9
  Top Layer w2: D7_CW18.C@75,165 75,174.879 D8_CW18.A@75.022,174.901
NetD7_CW19_C: D7_CW19.C D8_CW19.A | length 9.9
  Top Layer w2: D7_CW19.C@45,165 45,174.879 D8_CW19.A@45.022,174.901
NetD7_CW20_C: D7_CW20.C D8_CW20.A | length 9.9
  Top Layer w2: D7_CW20.C@15,165 15,174.879 D8_CW20.A@15.022,174.901
NetD8_CW1_C: D8_CW1.C D8_CW2.C D8_CW3.C D8_CW4.C D8_CW5.C D8_CW6.C D8_CW7.C D8_CW8.C D8_CW9.C D8_CW10.C D8_CW11.C D8_CW12.C D8_CW13.C D8_CW14.C D8_CW15.C D8_CW16.C D8_CW17.C D8_CW18.C D8_CW19.C D8_CW20.C J3.4 | length 734.5
  Top Layer w2: D8_CW7.C@104.5,7.5 104.59,7.41 D8_CW7.C@104.6,7.41 ; D8_CW7.C@104.75,7.5 D8_CW9.C@45,7.5 D8_CW10.C@15,7.5 14.91,7.59 13.627,7.59 2.25,18.967 2.25,166.033 13.627,177.41 14.91,177.41 D8_CW20.C@15,177.5 D8_CW19.C@45,177.5 D8_CW18.C@75,177.5 D8_CW17.C@105,177.5 D8_CW16.C@135,177.5 D8_CW15.C@165,177.5 D8_CW14.C@195,177.5 D8_CW13.C@225,177.5 D8_CW12.C@255,177.5 D8_CW11.C@285,177.5 ; D8_CW7.C@104.85,7.41 107.514,4.746 132.486,4.746 D8_CW6.C@135.15,7.41 ; D8_CW6.C@135.25,7.5 143,7.5 145.5,10 ; D8_CW6.C@135.4,7.41 135.41,7.41 D8_CW6.C@135.5,7.5 ; J3.4@145.5,16.79 145.5,10 ; D8_CW1.C@285,7.5 D8_CW2.C@255,7.5 D8_CW3.C@225,7.5 194.99,7.5 194.9,7.41 194.9,7.4 193.5,6 166.5,6 165.1,7.4 165.1,7.41 165.01,7.5 148,7.5 145.5,10
NetD9_NW1_A: D9_NW1.A D9_NW2.A D9_NW3.A D9_NW4.A D9_NW5.A D9_NW6.A D9_NW7.A D9_NW8.A D9_NW9.A D9_NW10.A D9_NW11.A D9_NW12.A D9_NW13.A D9_NW14.A D9_NW15.A D9_NW16.A D9_NW17.A D9_NW18.A D9_NW19.A D9_NW20.A D9_NW21.A D9_NW22.A D9_NW23.A D9_NW24.A D9_NW25.A D9_NW26.A D9_NW27.A D9_NW28.A J1.1 | length 1527.3
  Top Layer w1: D9_NW25.A@90,75 90.055,75.055 91.166,75.055 95.424,79.313 95.424,117.79 103.588,125.954 106.412,125.954 118.146,114.22 118.146,75.743 118.25,75.639 118.25,75 ; D9_NW5.A@120,22.5 119.945,22.555 118.445,22.555 117.5,23.5 117.5,74.25 118.25,75 ; D9_NW24.A@120,75 118.25,75 ; D9_NW3.A@180,22.5 182.25,22.5 184.5,20.25 ; D9_NW23.A@180,75 180,61.75 185,56.75 199,56.75 202.5,60.25 202.5,103.409 208.08,108.989 211.412,108.989 211.854,108.547 211.854,75.743 211.166,75.055 210.055,75.055 D9_NW22.A@210,75 210,72.634 225.134,57.5 294.854,57.5
  Top Layer w2: 5.246,73.18 6.18,73.18 D9_NW27.A@7.5,74.5 ; D9_NW25.A@89.9,74.801 88.381,74.801 87.646,75.536 87.646,108.754 89.775,110.884 89.775,128.75 60,128.75 30,128.75 7.5,128.75 6.318,128.75 5.146,127.578 5.146,73.18 5.146,70.146 5.146,23.036 5.881,22.301 7.5,22.301 9.12,22.301 11.348,24.529 11.348,46.921 13.576,49.149 17.295,49.149 23.139,43.305 23.139,27.543 28.932,21.75 31.069,21.75 36.861,27.543 36.861,43.305 42.654,49.098 47.346,49.098 53.173,43.271 53.173,27.327 59,21.5 60.819,21.5 66.887,27.568 66.887,43.331 72.654,49.098 77.346,49.098 83.139,43.305 83.139,27.543 88.932,21.75 91.069,21.75 96.158,26.84 96.158,43.742 101.514,49.098 106.846,49.098 108.608,47.336 108.608,10.474 109.381,9.701 130.619,9.701 131.392,10.474 131.392,17.086 131.392,30.164 131.392,47.392 133.098,49.098 138.736,49.098 142.924,44.91 142.924,27.758 148.381,22.301 D9_NW4.A@149.9,22.301 ; D9_NW4.A@150.1,22.301 151.62,22.301 153.677,24.359 153.677,40.828 162.447,49.598 167.553,49.598 170.053,47.098 170.053,19.079 174.346,14.786 182.654,14.786 184.135,16.267 184.135,17.135 J1.1@184.5,17.5 184.5,20.25 184.5,41.651 192.447,49.598 197.553,49.598 203.158,43.993 203.158,27.524 208.762,21.919 211.238,21.919 216.842,27.524 216.842,43.993 222.447,49.598 227.553,49.598 233.834,43.317 233.834,26.847 238.932,21.75 241.069,21.75 246.758,27.439 246.758,43.909 252.447,49.598 257.553,49.598 263.242,43.909 263.242,27.439 268.932,21.75 271.069,21.75 276.836,27.517 276.836,43.987 282.603,49.754 287.397,49.754 290.146,47.005 290.146,23.036 290.881,22.301 D9_NW10.A@292.4,22.301 ; D9_NW12.A@292.5,128.715 292.5,111.108 294.854,108.754 294.854,75.536 294.12,74.801 293.051,74.801 294.854,72.998 294.854,57.5 294.854,23.036 294.12,22.301 D9_NW10.A@292.6,22.301
NetD9_NW1_C: D9_NW1.C D10_NW1.A | length 7.4
  Top Layer w2: D9_NW1.C@240,24.645 D10_NW1.A@240,32.055
NetD9_NW2_C: D9_NW2.C D10_NW2.A | length 7.4
  Top Layer w2: D9_NW2.C@210,24.645 D10_NW2.A@210,32.055
NetD9_NW3_C: D9_NW3.C D10_NW3.A | length 7.4
  Top Layer w2: D9_NW3.C@180,24.645 D10_NW3.A@180,32.055
NetD9_NW4_C: D9_NW4.C D10_NW4.A | length 7.4
  Top Layer w2: D9_NW4.C@150,24.645 D10_NW4.A@150,32.055
NetD9_NW5_C: D9_NW5.C D10_NW5.A | length 7.4
  Top Layer w2: D9_NW5.C@120,24.645 D10_NW5.A@120,32.055
NetD9_NW6_C: D9_NW6.C D10_NW6.A | length 7.4
  Top Layer w2: D9_NW6.C@90,24.645 D10_NW6.A@90,32.055
NetD9_NW7_C: D9_NW7.C D10_NW7.A | length 7.4
  Top Layer w2: D9_NW7.C@60,24.645 D10_NW7.A@60,32.055
NetD9_NW8_C: D9_NW8.C D10_NW8.A | length 7.4
  Top Layer w2: D9_NW8.C@30,24.645 D10_NW8.A@30,32.055
NetD9_NW9_C: D9_NW9.C D10_NW9.A | length 7.4
  Top Layer w2: D9_NW9.C@7.5,24.645 D10_NW9.A@7.5,32.055
NetD9_NW10_C: D9_NW10.C D10_NW10.A | length 7.4
  Top Layer w2: D9_NW10.C@292.5,24.645 D10_NW10.A@292.5,32.055
NetD9_NW11_C: D9_NW11.C D10_NW11.A | length 7.4
  Top Layer w2: D9_NW11.C@270,24.645 D10_NW11.A@270,32.055
NetD9_NW12_C: D9_NW12.C D10_NW12.A | length 7.4
  Top Layer w2: D9_NW12.C@292.5,131.305 D10_NW12.A@292.5,138.715
NetD9_NW13_C: D9_NW13.C D10_NW13.A | length 7.4
  Top Layer w2: D9_NW13.C@270,131.305 D10_NW13.A@270,138.715
NetD9_NW14_C: D9_NW14.C D10_NW14.A | length 7.4
  Top Layer w2: D9_NW14.C@240,131.305 D10_NW14.A@240,138.715
NetD9_NW15_C: D9_NW15.C D10_NW15.A | length 7.4
  Top Layer w2: D9_NW15.C@210,131.305 D10_NW15.A@210,138.715
NetD9_NW16_C: D9_NW16.C D10_NW16.A | length 7.4
  Top Layer w2: D9_NW16.C@180,131.305 D10_NW16.A@180,138.715
NetD9_NW17_C: D9_NW17.C D10_NW17.A | length 7.4
  Top Layer w2: D9_NW17.C@150,131.305 D10_NW17.A@150,138.715
NetD9_NW18_C: D9_NW18.C D10_NW18.A | length 7.4
  Top Layer w2: D9_NW18.C@120,131.305 D10_NW18.A@120,138.715
NetD9_NW19_C: D9_NW19.C D10_NW19.A | length 7.4
  Top Layer w2: D9_NW19.C@90,131.305 D10_NW19.A@90,138.715
NetD9_NW20_C: D9_NW20.C D10_NW20.A | length 7.4
  Top Layer w2: D9_NW20.C@60,131.305 D10_NW20.A@60,138.715
NetD9_NW21_C: D9_NW21.C D10_NW21.A | length 7.4
  Top Layer w2: D9_NW21.C@30,131.305 D10_NW21.A@30,138.715
NetD9_NW22_C: D9_NW22.C D10_NW22.A | length 7.4
  Top Layer w2: D9_NW22.C@210,77.145 D10_NW22.A@210,84.555
NetD9_NW23_C: D9_NW23.C D10_NW23.A | length 7.3
  Top Layer w2: D9_NW23.C@180,77.145 180,84.395
NetD9_NW24_C: D9_NW24.C D10_NW24.A | length 7.3
  Top Layer w2: D9_NW24.C@120,77.145 120,84.395
NetD9_NW25_C: D9_NW25.C D10_NW25.A | length 7.1
  Top Layer w2: D9_NW25.C@90,77.145 90,84.25
NetD9_NW26_C: D9_NW26.C D10_NW26.A | length 7.1
  Top Layer w2: D9_NW26.C@292.5,77.145 292.5,84.25
NetD9_NW27_C: D9_NW27.C D10_NW27.A | length 7.4
  Top Layer w2: D9_NW27.C@7.5,77.145 D10_NW27.A@7.5,84.555
NetD9_NW28_C: D9_NW28.C D10_NW28.A | length 7.4
  Top Layer w2: D9_NW28.C@7.5,131.305 D10_NW28.A@7.5,138.715
NetD10_NW1_C: D10_NW1.C D11_NW1.A | length 7.4
  Top Layer w2: D10_NW1.C@240,34.645 D11_NW1.A@240,42.055
NetD10_NW2_C: D10_NW2.C D11_NW2.A | length 7.4
  Top Layer w2: D10_NW2.C@210,34.645 D11_NW2.A@210,42.055
NetD10_NW3_C: D10_NW3.C D11_NW3.A | length 7.4
  Top Layer w2: D10_NW3.C@180,34.645 D11_NW3.A@180,42.055
NetD10_NW4_C: D10_NW4.C D11_NW4.A | length 7.4
  Top Layer w2: D10_NW4.C@150,34.645 D11_NW4.A@150,42.055
NetD10_NW5_C: D10_NW5.C D11_NW5.A | length 7.4
  Top Layer w2: D10_NW5.C@120,34.645 D11_NW5.A@120,42.055
NetD10_NW6_C: D10_NW6.C D11_NW6.A | length 7.4
  Top Layer w2: D10_NW6.C@90,34.645 D11_NW6.A@90,42.055
NetD10_NW7_C: D10_NW7.C D11_NW7.A | length 7.4
  Top Layer w2: D10_NW7.C@60,34.645 D11_NW7.A@60,42.055
NetD10_NW8_C: D10_NW8.C D11_NW8.A | length 7.4
  Top Layer w2: D10_NW8.C@30,34.645 D11_NW8.A@30,42.055
NetD10_NW9_C: D10_NW9.C D11_NW9.A | length 7.4
  Top Layer w2: D10_NW9.C@7.5,34.645 D11_NW9.A@7.5,42.055
NetD10_NW10_C: D10_NW10.C D11_NW10.A | length 7.4
  Top Layer w2: D10_NW10.C@292.5,34.645 D11_NW10.A@292.5,42.055
NetD10_NW11_C: D10_NW11.C D11_NW11.A | length 7.4
  Top Layer w2: D10_NW11.C@270,34.645 D11_NW11.A@270,42.055
NetD10_NW12_C: D10_NW12.C D11_NW12.A | length 7.4
  Top Layer w2: D10_NW12.C@292.5,141.305 D11_NW12.A@292.5,148.715
NetD10_NW13_C: D10_NW13.C D11_NW13.A | length 7.4
  Top Layer w2: D10_NW13.C@270,141.305 D11_NW13.A@270,148.715
NetD10_NW14_C: D10_NW14.C D11_NW14.A | length 7.4
  Top Layer w2: D10_NW14.C@240,141.305 D11_NW14.A@240,148.715
NetD10_NW15_C: D10_NW15.C D11_NW15.A | length 7.4
  Top Layer w2: D10_NW15.C@210,141.305 D11_NW15.A@210,148.715
NetD10_NW16_C: D10_NW16.C D11_NW16.A | length 7.4
  Top Layer w2: D10_NW16.C@180,141.305 D11_NW16.A@180,148.715
NetD10_NW17_C: D10_NW17.C D11_NW17.A | length 7.4
  Top Layer w2: D10_NW17.C@150,141.305 D11_NW17.A@150,148.715
NetD10_NW18_C: D10_NW18.C D11_NW18.A | length 7.4
  Top Layer w2: D10_NW18.C@120,141.305 D11_NW18.A@120,148.715
NetD10_NW19_C: D10_NW19.C D11_NW19.A | length 7.4
  Top Layer w2: D10_NW19.C@90,141.305 D11_NW19.A@90,148.715
NetD10_NW20_C: D10_NW20.C D11_NW20.A | length 7.4
  Top Layer w2: D10_NW20.C@60,141.305 D11_NW20.A@60,148.715
NetD10_NW21_C: D10_NW21.C D11_NW21.A | length 7.4
  Top Layer w2: D10_NW21.C@30,141.305 D11_NW21.A@30,148.715
NetD10_NW22_C: D10_NW22.C D11_NW22.A | length 7.4
  Top Layer w2: D10_NW22.C@210,87.145 D11_NW22.A@210,94.555
NetD10_NW23_C: D10_NW23.C D11_NW23.A | length 7.3
  Top Layer w2: D10_NW23.C@180,87.145 180,94.395
NetD10_NW24_C: D10_NW24.C D11_NW24.A | length 7.3
  Top Layer w2: D10_NW24.C@120,87.145 120,94.395
NetD10_NW25_C: D10_NW25.C D11_NW25.A | length 7.1
  Top Layer w2: D10_NW25.C@90,87.145 90,94.25
NetD10_NW26_C: D10_NW26.C D11_NW26.A | length 7.1
  Top Layer w2: D10_NW26.C@292.5,87.145 292.5,94.25
NetD10_NW27_C: D10_NW27.C D11_NW27.A | length 7.1
  Top Layer w2: D10_NW27.C@7.5,87.145 7.5,94.25
NetD10_NW28_C: D10_NW28.C D11_NW28.A | length 7.4
  Top Layer w2: D10_NW28.C@7.5,141.305 D11_NW28.A@7.5,148.715
NetD11_NW1_C: D11_NW1.C D12_NW1.A | length 7.4
  Top Layer w2: D11_NW1.C@240,44.645 D12_NW1.A@240,52.055
NetD11_NW2_C: D11_NW2.C D12_NW2.A | length 7.4
  Top Layer w2: D11_NW2.C@210,44.645 D12_NW2.A@210,52.055
NetD11_NW3_C: D11_NW3.C D12_NW3.A | length 7.4
  Top Layer w2: D11_NW3.C@180,44.645 D12_NW3.A@180,52.055
NetD11_NW4_C: D11_NW4.C D12_NW4.A | length 7.4
  Top Layer w2: D11_NW4.C@150,44.645 D12_NW4.A@150,52.055
NetD11_NW5_C: D11_NW5.C D12_NW5.A | length 7.4
  Top Layer w2: D11_NW5.C@120,44.645 D12_NW5.A@120,52.055
NetD11_NW6_C: D11_NW6.C D12_NW6.A | length 7.4
  Top Layer w2: D11_NW6.C@90,44.645 D12_NW6.A@90,52.055
NetD11_NW7_C: D11_NW7.C D12_NW7.A | length 7.4
  Top Layer w2: D11_NW7.C@60,44.645 D12_NW7.A@60,52.055
NetD11_NW8_C: D11_NW8.C D12_NW8.A | length 7.4
  Top Layer w2: D11_NW8.C@30,44.645 D12_NW8.A@30,52.055
NetD11_NW9_C: D11_NW9.C D12_NW9.A | length 7.4
  Top Layer w2: D11_NW9.C@7.5,44.645 D12_NW9.A@7.5,52.055
NetD11_NW10_C: D11_NW10.C D12_NW10.A | length 7.4
  Top Layer w2: D11_NW10.C@292.5,44.645 D12_NW10.A@292.5,52.055
NetD11_NW11_C: D11_NW11.C D12_NW11.A | length 7.4
  Top Layer w2: D11_NW11.C@270,44.645 D12_NW11.A@270,52.055
NetD11_NW12_C: D11_NW12.C D12_NW12.A | length 7.4
  Top Layer w2: D11_NW12.C@292.5,151.305 D12_NW12.A@292.5,158.715
NetD11_NW13_C: D11_NW13.C D12_NW13.A | length 7.4
  Top Layer w2: D11_NW13.C@270,151.305 D12_NW13.A@270,158.715
NetD11_NW14_C: D11_NW14.C D12_NW14.A | length 7.4
  Top Layer w2: D11_NW14.C@240,151.305 D12_NW14.A@240,158.715
NetD11_NW15_C: D11_NW15.C D12_NW15.A | length 7.4
  Top Layer w2: D11_NW15.C@210,151.305 D12_NW15.A@210,158.715
NetD11_NW16_C: D11_NW16.C D12_NW16.A | length 7.4
  Top Layer w2: D11_NW16.C@180,151.305 D12_NW16.A@180,158.715
NetD11_NW17_C: D11_NW17.C D12_NW17.A | length 7.4
  Top Layer w2: D11_NW17.C@150,151.305 D12_NW17.A@150,158.715
NetD11_NW18_C: D11_NW18.C D12_NW18.A | length 7.4
  Top Layer w2: D11_NW18.C@120,151.305 D12_NW18.A@120,158.715
NetD11_NW19_C: D11_NW19.C D12_NW19.A | length 7.4
  Top Layer w2: D11_NW19.C@90,151.305 D12_NW19.A@90,158.715
NetD11_NW20_C: D11_NW20.C D12_NW20.A | length 7.4
  Top Layer w2: D11_NW20.C@60,151.305 D12_NW20.A@60,158.715
NetD11_NW21_C: D11_NW21.C D12_NW21.A | length 7.4
  Top Layer w2: D11_NW21.C@30,151.305 D12_NW21.A@30,158.715
NetD11_NW22_C: D11_NW22.C D12_NW22.A | length 7.4
  Top Layer w2: D11_NW22.C@210,97.145 D12_NW22.A@210,104.555
NetD11_NW23_C: D11_NW23.C D12_NW23.A | length 7.4
  Top Layer w2: D11_NW23.C@180,97.145 D12_NW23.A@180,104.555
NetD11_NW24_C: D11_NW24.C D12_NW24.A | length 7.4
  Top Layer w2: D11_NW24.C@120,97.145 D12_NW24.A@120,104.555
NetD11_NW25_C: D11_NW25.C D12_NW25.A | length 7.4
  Top Layer w2: D11_NW25.C@90,97.145 D12_NW25.A@90,104.555
NetD11_NW26_C: D11_NW26.C D12_NW26.A | length 7.4
  Top Layer w2: D11_NW26.C@292.5,97.145 D12_NW26.A@292.5,104.555
NetD11_NW27_C: D11_NW27.C D12_NW27.A | length 7.1
  Top Layer w2: D11_NW27.C@7.5,97.145 7.5,104.25
NetD11_NW28_C: D11_NW28.C D12_NW28.A | length 7.4
  Top Layer w2: D11_NW28.C@7.5,151.305 D12_NW28.A@7.5,158.715
NetD12_NW1_C: D12_NW1.C D12_NW2.C D12_NW3.C D12_NW4.C D12_NW5.C D12_NW6.C D12_NW7.C D12_NW8.C D12_NW9.C D12_NW10.C D12_NW11.C D12_NW12.C D12_NW13.C D12_NW14.C D12_NW15.C D12_NW16.C D12_NW17.C D12_NW18.C D12_NW19.C D12_NW20.C D12_NW21.C D12_NW22.C D12_NW23.C D12_NW24.C D12_NW25.C D12_NW26.C D12_NW27.C D12_NW28.C J1.4 | length 1386.2
  Top Layer w2: D12_NW27.C@7.5,107.145 7.59,107.055 8.874,107.055 10.5,105.429 10.5,74.312 7.5,71.313 D12_NW9.C@7.5,54.645 D12_NW8.C@30,54.645 D12_NW7.C@60,54.645 D12_NW6.C@90,54.645 107.355,54.645 110.862,51.138 110.862,18.02 114.346,14.536 125.654,14.536 129.138,18.02 129.138,29.23 129.138,48.27 129.25,48.382 129.25,48.5 135.395,54.645 D12_NW4.C@150,54.645 174.5,54.645 ; D12_NW28.C@7.5,161.305 11.074,161.305 12.549,159.83 12.549,136.877 14.025,135.402 17.553,135.402 23.149,140.998 23.149,155.738 28.627,161.215 29.91,161.215 D12_NW21.C@30,161.305 ; 31.374,161.009 31.579,161.009 37.013,155.575 37.013,140.836 42.447,135.402 47.553,135.402 51.727,139.576 51.727,157.131 55.9,161.305 D12_NW20.C@60,161.305 ; 61.8,160.755 61.833,160.755 67.14,155.448 67.14,140.709 72.447,135.402 77.553,135.402 81.898,139.747 81.898,156.96 86.242,161.305 D12_NW19.C@90,161.305 90.09,161.215 91.374,161.215 95.246,157.342 95.246,142.603 102.447,135.402 104.75,135.402 ; D12_NW25.C@90,107.145 90.09,107.235 90.1,107.235 93.67,110.805 93.67,118.517 102.861,127.708 105,127.708 ; D12_NW5.C@120,54.645 120,71.572 122.354,73.926 122.354,106.074 121.374,107.055 120.09,107.055 D12_NW24.C@120,107.145 120,114.847 107.139,127.708 105,127.708 ; D12_NW18.C@120,161.305 119.91,161.215 118.627,161.215 114.754,157.342 114.754,142.603 107.553,135.402 104.75,135.402 ; 121.374,161.215 127.113,155.475 127.113,140.736 132.853,134.996 137.147,134.996 142.623,140.472 142.623,154.858 147.659,159.894 ; D12_NW17.C@150,161.305 150.09,161.215 151.374,161.215 157.377,155.211 157.377,140.472 162.447,135.402 167.553,135.402 172.623,140.472 172.623,155.211 178.627,161.215 ; J1.4@175.135,17.96 172.307,20.788 172.307,48.235 178.627,54.555 ; D12_NW23.C@180,107.145 179.91,107.055 178.627,107.055 174.5,102.928 174.5,54.645 ; D12_NW16.C@180,161.305 184.1,161.305 188.74,156.665 188.74,139.072 192.41,135.402 197.553,135.402 204.5,142.349 204.5,157.088 208.381,160.969 208.627,160.969 ; D12_NW22.C@210,107.145 209.91,107.055 208.627,107.055 205,103.428 205,54.645 ; D12_NW15.C@210,161.305 214.1,161.305 218.74,156.665 218.74,139.072 222.41,135.402 227.553,135.402 232.623,140.472 232.623,155.211 236.908,159.496 237.646,159.496 ; D12_NW14.C@240,161.305 240.09,161.215 241.374,161.215 247.377,155.211 247.377,140.185 252.16,135.402 257.553,135.402 264.5,142.349 264.5,157.088 268.381,160.969 268.627,160.969 ; D12_NW13.C@270,161.305 270.09,161.215 271.374,161.215 278.65,153.938 278.65,138.6 283.75,133.5 290.146,133.5 ; D12_NW10.C@292.5,54.645 D12_NW11.C@270,54.645 D12_NW2.C@210,54.645 205,54.645 ; D12_NW26.C@292.5,107.145 292.41,107.235 292.4,107.235 290.146,109.489 290.146,133.5 ; D12_NW12.C@292.5,161.305 292.41,161.215 291.127,161.215 290.146,160.234 290.146,133.5 ; 104.75,135.402 105,135.152 105,127.708 ; 174.5,54.645 D12_NW3.C@180,54.645 205,54.645
NetJ1_2: J1.2 R1.2 | length 19
  Top Layer w0.3: R1.2@176.25,32.95 176.275,32.95 176.521,32.704 176.692,32.704 177.304,32.092 177.304,21.196 179.09,19.41 181.324,19.41 181.5,19.234 J1.2@181.5,17.5
NetJ1_3: J1.3 R1.1 | length 15.5
  Top Layer w0.3: R1.1@176.25,32.05 176.275,32.05 176.375,31.95 176.375,31.925 176.75,31.55 176.75,20.967 178.015,19.702 178.015,17.985 J1.3@178.5,17.5
NetJ2_2: J2.2 R2.2 | length 17.6
  Top Layer w0.3: J2.2@121.5,17.5 121.5,18.075 121.985,18.56 122.258,18.56 125.429,21.731 125.429,32.467 125.192,32.704 125.021,32.704 124.775,32.95 R2.2@124.75,32.95
NetJ2_3: J2.3 R2.1 | length 18.1
  Top Layer w0.3: J2.3@118.5,18.075 118.985,18.56 120.144,18.56 120.871,19.287 122.201,19.287 124.75,21.836 R2.1@124.75,32.05 R2.1@124.875,32.05
NetJ3_2: J3.2 R3.2 | length 17.8
  Top Layer w0.3: J3.2@151.5,17.5 151.5,18.075 151.985,18.56 152.345,18.56 158.75,24.965 R3.2@158.75,32.05
NetJ3_3: J3.3 R3.1 | length 26.7
  Top Layer w0.3: J3.3@148.5,17.5 149.585,17.5 150.141,16.944 150.141,15.942 150.698,15.386 152.302,15.386 152.539,15.623 152.539,17.955 154.034,19.45 154.034,19.466 159.651,25.083 159.651,32.774 159.475,32.95 R3.1@158.75,32.95
pads on no net: J1.M J2.M J3.M

## Keep-outs
Keep-Out Layer:
  the board outline again, w0.5